# Altium PCB smartControllerDIP.PCBDOC
Units mm, origin at the board's own origin, x right, y up, seen from the top; angles counter-clockwise.
Board outline 152.4 x 101.6 mm, 2 copper layers (Top Layer, Bottom Layer); 23 components, 29 nets, 129 pads, 6 vias.
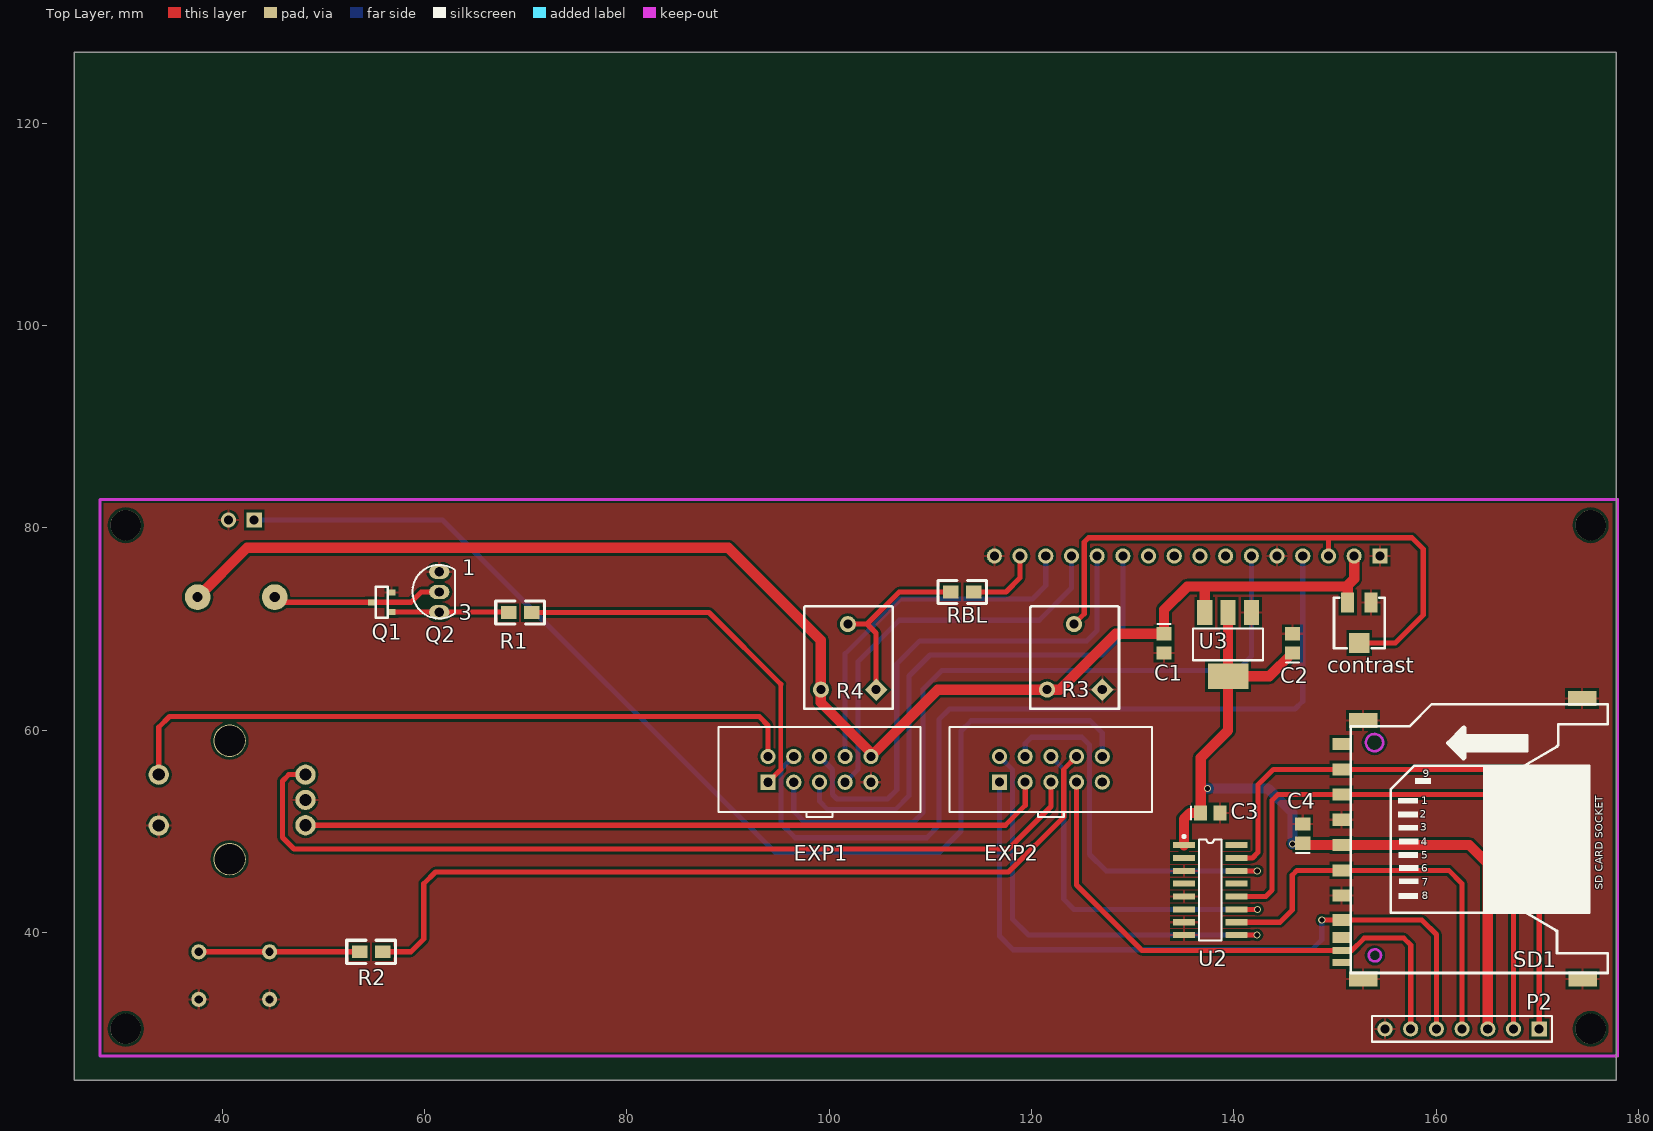
[diagram p0: Top Layer view]
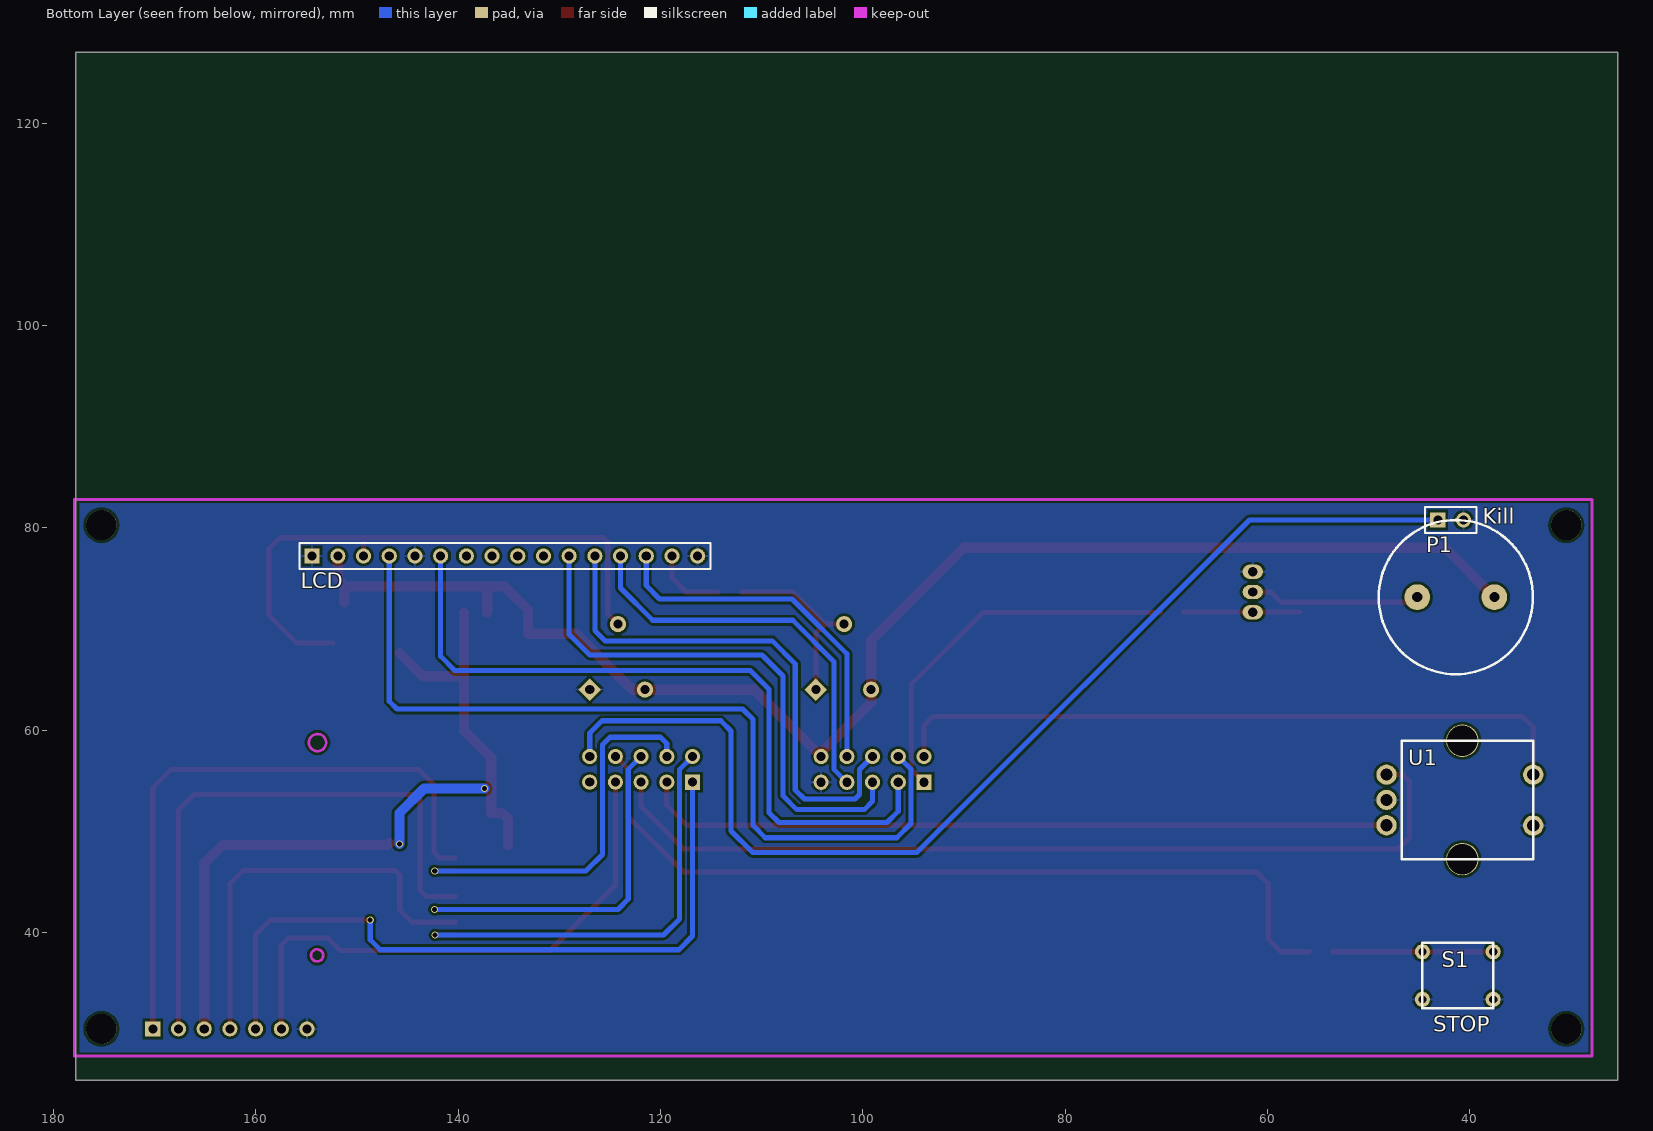
[diagram p1: Bottom Layer view, seen from below]

## Layer stack, top to bottom
Top Layer: signal copper 0.0356
Dielectric: dielectric 0.32, FR-4, Dk 4.8
Bottom Layer: signal copper 0.0356

## Board outline
25.4,25.4 177.8,25.4 177.8,127 25.4,127

## Design rules (kind name [scope] priority, off if disabled: settings)
Clearance [All] p1: gap=0.254
ComponentClearance [All] p1: gap=0.254 collisioncheckmode=0
HoleSize [All] p1: absolutevalues=TRUE maxlimit=3.81 minlimit=0.025 maxpercent=80.000 minpercent=20.000
PolygonConnect [All] p1: connectstyle=Relief reliefconductorwidth=0.254 reliefentries=4 polygonreliefangle="90 Angle"
RoutingVias [All] p1: holewidth=0.711 width=1.27 viastyle="Through Hole" minholewidth=0.5 minwidth=0.7 maxholewidth=0.711 maxwidth=1.27
SolderMaskExpansion [All] p1: expansion=0.102
TestPointUsage [All] p1: valid=0 allowmultiple=FALSE
Testpoint [All] p1: side=15 testpointundercomponent=TRUE minsize=1.016 maxsize=2.54 preferedsize=1.524 minholesize=0 maxholesize=1.016 preferedholesize=0.813 testpointgrid=0.025 style=1023 order=1234567890
Width power [InNetClass('power')] p1: maxlimit=1.016 minlimit=0.254 preferedwidth=1.016
Width [All] p2: maxlimit=1.016 minlimit=0.254 preferedwidth=0.508
16 further rules are at their usual default settings.

## Classes and differential pairs
net class power: GND VCC VDD

## Components (designator, comment, footprint, x,y, rotation, side; value= is the part's Value field where it differs from the comment)
C1 "Cap Pol3" CC2012-0805 133.096,68.58 r270 top
C2 "Cap Pol3" CC2012-0805 145.796,68.58 r90 top
C3 "Cap Pol3" CC2012-0805 137.668,51.816 r0 top
C4 "Cap Pol3" CC2012-0805 146.812,49.784 r90 top
contrast "RPot SM" POT4MM-2 152.4,70.612 r270 top
EXP1 "Header 5X2" 10pin牛角公座 93.968,54.858 r0 top
EXP2 "Header 5X2" 10pin牛角公座 116.84,54.864 r0 top
Kill "Bell" speaker 45.212,73.152 r180 bottom (schematic designator K1ll)
LCD "Header 16" HDR1X16 154.432,77.216 r180 bottom
P1 "Header 2" HDR1X2 43.18,80.772 r180 bottom
P2 "Header 7" HDR1X7 170.18,30.48 r180 top
Q1 "S8050" sot-23 56.388,71.12 r90 top
Q2 "S8050" A684 61.468,73.66 r270 top
R1 "Res1" 0805 70.612,71.628 r180 top
R2 "Res1" 0805 55.88,38.1 r180 top
R3 "VR1" VR1 127,64.008 r180 top
R4 "VR1" VR1 104.648,64.008 r180 top
RBL "Res1" 0805 114.3,73.66 r180 top
S1 "SW DIP4" "SW DIP4" 44.704,38.1 r270 bottom
SD1 "SD硈钡竟" SD-4 162.56,49.276 r90 top
U1 "上下數 編碼器" "上下數 編碼器" 48.25,55.607 r270 bottom
U2 "MC74HC4050D" 751B-03 137.668,44.196 r270 top
U3 "LM1117" SOT-223 141.732,71.628 r180 top

## Footprints (in the part's own frame and the unit in brackets; to place one, negate y for a bottom-side part, rotate by r counter-clockwise, add the part's x,y. Pads: shape width x height; smd on the part's side, far side on the other; paste and mask are expansions set on the pad)
10pin牛角公座 [mm]
  rect 1.5x1.5 hole 0.9: 1(0,0)
  round 1.5 hole 0.9: 2(0,2.54) 3(2.54,0) 4(2.54,2.54) 5(5.08,0) 6(5.08,2.54) 7(7.62,0) 8(7.62,2.54) 9(10.16,0) 10(10.16,2.54)
  silkscreen extent -4.92,-3.43 15.08,5.47
751B-03 [mm] "Small Outline; 16 Leads; Body Width 3.9 mm; Pitch 1.27 mm"
  rect 0.6x2.2 smd: 1(-4.445,-2.6) 2(-3.175,-2.6) 3(-1.905,-2.6) 4(-0.635,-2.6) 5(0.635,-2.6) 6(1.905,-2.6) 7(3.175,-2.6) 8(4.445,-2.6) 9(4.445,2.6) 10(3.175,2.6) 11(1.905,2.6) 12(0.635,2.6) 13(-0.635,2.6) 14(-1.905,2.6) 15(-3.175,2.6) 16(-4.445,2.6)
  silkscreen extent -5.42,-2.72 5,1.1
0805 [mil]
  rect 60x50 smd: 1(0,0) 2(90,0)
  silkscreen extent -50,-45 140,45
A684 [mm]
  oval 1.4x2 hole 0.9: 1(-2,0) 2(0,0) 3(2,0)
  silkscreen extent -2.68,-2.65 2.62,1.55
CC2012-0805 [mm] "Chip Capacitor; Body 2.0 x 1.2 mm (LxW typ)"
  rect 1.3x1.5 smd: 1(-0.95,0) 2(0.95,0)
  silkscreen extent -1.9,-0.65 -1.9,0.65
HDR1X2 [mm] "Connector; Header; 2 Position"
  rect 1.5x1.5 hole 0.9: 1(0,0)
  round 1.5 hole 0.9: 2(2.54,0)
  silkscreen extent -1.27,-1.27 3.81,1.27
HDR1X7 [mm] "Connector; Header; 7 Position"
  rect 1.5x1.5 hole 0.9: 1(0,0)
  round 1.5 hole 0.9: 2(2.54,0) 3(5.08,0) 4(7.62,0) 5(10.16,0) 6(12.7,0) 7(15.24,0)
  silkscreen extent -1.27,-1.27 16.51,1.27
HDR1X16 [mm] "Connector; Header; 16 Position"
  rect 1.5x1.5 hole 0.9: 1(0,0)
  round 1.5 hole 0.9: 2(2.54,0) 3(5.08,0) 4(7.62,0) 5(10.16,0) 6(12.7,0) 7(15.24,0) 8(17.78,0) 9(20.32,0) 10(22.86,0) 11(25.4,0) 12(27.94,0) 13(30.48,0) 14(33.02,0) 15(35.56,0) 16(38.1,0)
  silkscreen extent -1.27,-1.27 39.37,1.27
POT4MM-2 [mm] "Square Trimming Potentiometer"
  rect 2x1.3 smd: CCW(-2,-1.15) CW(-2,1.15)
  rect 2x2 smd: W(2,0)
  silkscreen extent -2.5,-2.5 2.5,2.5
SD-4 [mm]
  rect 1.2x1.8 smd: 1(6.858,11.917) 2(4.369,11.917) 3(1.875,11.908) 4(-0.625,11.908) 5(-3.125,11.908) 6(-5.625,11.908) 7(-8.05,11.908) 9(9.375,11.908)
  rect 1.1x1.8 smd: 8(-9.754,11.917)
  rect 0.7x1.8 smd: 10(-11.05,11.908) 12(-12.243,11.917)
  rect 1.5x2.8 smd: 11(-13.868,-11.917) 11(-13.868,9.774) 11(11.684,9.774) 11(13.868,-11.866)
  Keep-Out Layer circle w0.254: c-11.532,8.617 r0.6
  Keep-Out Layer circle w0.254: c9.5,8.657 r0.85
  silkscreen extent -13.27,-14.38 13.3,11.02
sot-23 [mm]
  rect 0.6x0.8 smd: 1(0.56,-0.36) 2(2.48,-0.36) 3(1.52,1.56)
  silkscreen extent 0,0 3.04,1.2
SOT-223 [mm]
  rect 1.5x2.5 smd: 1(0,0) 2(2.3,0) 3(4.6,0)
  rect 4x2.5 smd: 4(2.3,6.3)
  silkscreen extent -1.15,1.58 5.75,4.72
speaker [mm]
  round 2.54 hole 1: 1(0,0) 2(7.62,0)
  silkscreen extent -3.81,-7.62 11.43,7.62
"SW DIP4" [mm]
  round 1.5 hole 0.8: 1A(0,7) 1B(0,0) 2A(4.699,7) 2B(4.699,0)
  silkscreen extent -0.89,0 5.56,7
VR1 [mm]
  rect 1.6x1.6 hole 0.9 rot 45: 1(0,0)
  round 1.6 hole 0.9: 2(2.794,-6.477) 3(5.461,0)
  silkscreen extent -1.65,-8.25 7.11,1.91
"上下數 編碼器" [mm]
  round 2 hole 1.2: 1(0,0) 2(2.5,0) 3(5,0) 4(5.029,14.5) 5(0,14.5)
  round 3.2 hole 3: 6(-3.35,7.5) 7(8.35,7.5)
  silkscreen extent -3.35,1.5 8.35,14.5

## Part data
C1 C2 C3 C4: "Polarized Capacitor (Surface Mount)"
contrast: "Square Trimming Potentiometer"
EXP1 EXP2: "Header, 5-Pin, Dual row"
Kill: "Electrical Bell"
LCD: "Header, 16-Pin"
P1: "Header, 2-Pin"
P2: "Header, 7-Pin"
Q1: library part 2N3904, "NPN General Purpose Amplifier"
Q2: library part A684
R1 R2 RBL: "Resistor"
R3 R4: "Potentiometer"
S1: "Single-Pole, Single-Throw Switch"
U2: "Hex Non-Inverting Buffer/Logic-Level Down Converter"
U3: library part MIC5209-3.3YS

## Free pads (board coordinates)
  round 3 hole 3: 3(175.26,30.48) 4(175.26,80.264) 5(30.48,30.48) 5(30.48,80.264) 5(175.26,30.48) 5(175.26,80.264) 6(30.48,30.48)

## Via types
v1: diameter 0.7, hole 0.5, Top Layer to Bottom Layer, 6 vias

## Nets (pads, with @x,y where several pads share a name; then routed paths per layer and width w, separated by ;. In a path a pad name is that pad's centre, name@x,y a point inside that pad or via, vN(x,y) a via of type N, cw(c..) or ccw(c..) an arc to the next point about the centre after c; other vN are vias at no path point)
CLK: P2.4 SD1.5 U2.10 | length 41.3
  Top Layer w0.508: U2.10 144.551,41.021 145.771,42.24 145.771,45.669 146.252,46.151 161.24,46.151 162.56,44.831 P2.4
GND: C1.2 C2.2 C3.2 C4.2 contrast.CW EXP1.9 LCD.1 LCD.5 LCD.16 P1.2 P2.7 Q1.2 Q2.1 R3.1 S1.2A S1.2B SD1.3 SD1.6 SD1.11 U1.2 U1.4 U2.3 U2.5 U2.7 U2.8 U3.1
LCD4: EXP1.5 LCD.11 | length 54.1
  Bottom Layer w0.508: EXP1.5 99.048,52.971 99.873,52.146 106.528,52.146 107.899,53.518 107.899,65.354 109.982,67.437 127,67.437 129.032,69.469 LCD.11
LCD5: EXP1.6 LCD.12 | length 52.1
  Bottom Layer w0.508: EXP1.6 100.33,56.116 100.33,54.882 ; 100.33,54.834 100.33,53.645 100.787,53.188 105.766,53.188 106.68,54.102 106.68,66.548 108.966,68.834 125.476,68.834 126.492,69.85 LCD.12
LCD6: EXP1.7 LCD.13 | length 39.7
  Bottom Layer w0.508: EXP1.7 102.87,56.14 102.87,57.374 ; 102.87,57.422 102.87,66.802 106.934,70.866 120.777,70.866 123.952,74.041 LCD.13
LCD7: EXP1.8 LCD.14 | length 35.7
  Bottom Layer w0.508: EXP1.8 101.588,67.552 107.01,72.974 120.091,72.974 121.412,74.295 LCD.14
LCDE: EXP1.3 LCD.6 | length 72.4
  Bottom Layer w0.508: EXP1.3 96.508,51.981 97.612,50.876 108.306,50.876 109.296,51.867 109.296,64.084 111.125,65.913 140.335,65.913 141.732,67.31 LCD.6
LCDRS: EXP1.4 LCD.4 | length 85.3
  Bottom Layer w0.508: 95.25,54.834 95.25,50.775 96.647,49.378 109.652,49.378 110.846,50.571 110.846,61.062 111.887,62.103 146.05,62.103 146.812,62.865 LCD.4 ; 95.25,54.882 95.25,56.14 EXP1.4
"MEGA 188EEPER": EXP1.1 R1.1 | length 37.8
  Top Layer w0.483: 95.225,56.115 95.225,64.541
  Top Layer w0.508: R1.1 88.138,71.628 95.225,64.541 ; EXP1.1 95.225,56.115
NetEXP1_2: EXP1.2 U1.5 | length 68.8
  Top Layer w0.508: U1.5 33.75,60.293 34.798,61.341 93.091,61.341 93.968,60.464 EXP1.2
NetEXP2_1: EXP2.1 P2.5 SD1.7 | length 71.2
  Top Layer w0.508: v1(148.693,41.226) 158.596,41.226 160.02,39.802 P2.5
  Bottom Layer w0.508: EXP2.1 116.84,39.649 118.186,38.303 147.701,38.303 148.693,39.296 v1(148.693,41.226)
NetEXP2_2: EXP2.2 U2.9 | length 43.4
  Top Layer w0.508: U2.9 v1(142.291,39.751)
  Bottom Layer w0.508: EXP2.2 118.11,56.134 118.11,41.351 119.71,39.751 v1(142.291,39.751)
NetEXP2_3: EXP2.3 U1.3 | length 74.2
  Top Layer w0.508: U1.3 117.409,50.607 119.38,52.578 EXP2.3
NetEXP2_4: EXP2.4 U2.14 | length 38.4
  Top Layer w0.508: U2.14 v1(142.316,46.101)
  Bottom Layer w0.508: EXP2.4 119.38,58.699 119.99,59.309 124.993,59.309 125.73,58.572 125.73,47.727 127.356,46.101 v1(142.316,46.101)
NetEXP2_5: EXP2.5 U1.1 | length 88.7
  Top Layer w0.508: U1.1 46.59,55.607 45.974,54.991 45.974,49.403 47.117,48.26 117.729,48.26 121.92,52.451 EXP2.5
NetEXP2_6: EXP2.6 U2.11 | length 36.3
  Top Layer w0.508: U2.11 v1(142.342,42.291)
  Bottom Layer w0.508: EXP2.6 123.19,56.134 123.19,43.307 124.206,42.291 v1(142.342,42.291)
NetEXP2_7: EXP2.7 P2.6 SD1.10 | length 54.9
  Top Layer w0.508: EXP2.7 124.46,44.704 130.938,38.226 151.662,38.226 152.883,39.446 156.794,39.446 157.48,38.76 P2.6
NetEXP2_8: EXP2.8 R2.1 | length 82.5
  Top Layer w0.508: R2.1 58.674,38.1 59.944,39.37 59.944,44.831 61.087,45.974 117.729,45.974 123.19,51.435 123.19,56.134 EXP2.8
NetEXP2_10: EXP2.10 P1.1 | length 111.4
  Bottom Layer w0.508: P1.1 61.798,80.772 94.64,47.93 110.922,47.93 113.03,50.038 113.03,59.919 114.046,60.935 125.781,60.935 127,59.715 EXP2.10
NetK1ll_1: Kill.1 Q1.3 Q2.2 | length 16.9
  Top Layer w0.508: Kill.1 45.724,72.64 58.67,72.64 59.69,73.66 Q2.2
NetLCD_15: LCD.15 RBL.1 | length 7.3
  Top Layer w0.508: RBL.1 117.475,73.66 118.872,75.057 LCD.15
NetP2_1: P2.1 SD1.1 U2.15 | length 62
  Top Layer w0.508: U2.15 141.834,47.371 142.392,47.93 142.392,54.61 143.916,56.134 168.351,56.134 170.18,54.305 P2.1
NetP2_2: P2.2 SD1.2 U2.12 | length 59
  Top Layer w0.508: U2.12 143.154,43.561 143.789,44.196 143.789,53.086 144.348,53.645 166.116,53.645 167.64,52.121 P2.2
NetQ1_1: Q1.1 Q2.3 R1.2 | length 11.6
  Top Layer w0.508: Q1.1 68.274,71.68 R1.2
NetR2_2: R2.2 S1.1A S1.1B | length 15.9
  Top Layer w0.508: S1.1A R2.2
NetR4_1: R4.1 R4.2 RBL.2 | length 18.3
  Top Layer w0.508: R4.2 103.759,70.485 ; R4.1 104.648,69.596 103.759,70.485 ; RBL.2 106.934,73.66 103.759,70.485
VCC: C1.1 contrast.CCW EXP1.10 Kill.2 LCD.2 R3.3 R4.3 U3.3 | length 143.8
  Top Layer w1.016: Kill.2 42.469,78.029 90.043,78.029 99.187,68.885 99.187,62.738 104.128,57.797 EXP1.10 110.738,64.008 122.809,64.008 128.331,69.53 C1.1 133.096,71.907 135.385,74.196 151.107,74.196 ; U3.3 137.132,74.196 ; contrast.CCW 151.25,74.053 151.107,74.196 ; LCD.2 151.892,74.981 151.107,74.196
VDD: C2.1 C3.1 C4.1 P2.3 SD1.4 U2.1 U3.2 U3.4 | length 80.6
  Top Layer w1.016: U2.1 135.068,51.223 135.661,51.816 C3.1 136.718,57.292 139.432,60.006 U3.2 ; U3.4 143.494,65.328 C2.1 ; C4.1 146.995,48.651 163.287,48.651 165.1,46.838 P2.3
  Bottom Layer w1.016: v1(137.414,54.229) 143.383,54.229 145.796,51.816 v1(145.796,48.768)
VLCD: contrast.W LCD.3 R3.2 | length 58.5
  Top Layer w0.508: R3.2 125.222,71.501 125.222,78.613 125.628,79.019 157.607,79.019 158.718,77.908 158.718,71.374 155.956,68.612 contrast.W ; LCD.3 149.352,79.019
pads on no net: EXP2.9 LCD.7 LCD.8 LCD.9 LCD.10 SD1.8 SD1.9 SD1.12 U1.6 U1.7 U2.2 U2.4 U2.6 U2.13 U2.16

## Polygon pours and split planes (outlines as drawn)
GND on Top Layer (solid, remove dead copper): 28.321,82.423 28.321,28.194 177.419,28.194 177.419,82.423
GND on Bottom Layer (solid, remove dead copper): 28.321,82.423 28.321,28.194 177.419,28.194 177.419,82.423

## Keep-outs
Keep-Out Layer:
  lines w0.254: 27.94,27.804 177.94,27.804 177.94,82.804 27.94,82.804 27.94,27.804

## Silkscreen, mask and mechanical layers (free items; w line width, h text height)
Top Overlay:
  rectangle: 156.264,43.325 158.2,43.899
  rectangle: 156.282,47.393 158.218,47.967
  rectangle: 156.318,48.719 158.254,49.293
  rectangle: 156.318,46.103 158.254,46.676
  rectangle: 156.318,44.777 158.254,45.35
  rectangle: 156.282,50.081 158.218,50.655
  rectangle: 156.246,51.372 158.182,51.945
  rectangle: 156.246,52.734 158.182,53.307
  rectangle: 157.895,54.705 159.472,55.279
  rectangle: 162.734,57.913 169.007,58.325
  rectangle: 162.734,58.63 169.007,59.508
  rectangle: 161.775,58.2 162.358,58.773
  rectangle: 161.775,58.773 162.465,59.248
  rectangle: 161.497,58.469 162.322,59.078
  rectangle: 162.322,57.573 162.734,58.469
  rectangle: 162.017,57.895 162.734,59.705
  rectangle: 162.734,58.218 169.007,59.168
  rectangle: 164.634,41.945 175.1,56.497
  lines w0.254: 158.433,56.497 157.859,56.497 ; 162.734,59.454 162.788,59.508 169.007,59.508 169.007,57.913 162.967,57.913 162.913,57.967 ; 157.609,41.945 155.53,41.945 155.53,54.168 157.859,56.497 ; 157.609,41.945 157.609,41.945 ; 157.609,41.945 175.1,41.945 175.1,56.497 159.974,56.497 157.859,56.497 ; 162.734,58.218 162.734,59.168 169.007,59.168 169.007,58.218 162.734,58.218
  lines w0.5: 162.734,57.304 162.734,60.207
  lines w0.508: 162.698,57.268 161.247,58.72 162.734,60.207
  text "9" at 158.648,55.35 h0.76
  text "1" at 158.54,52.698 h0.76
  text "2" at 158.397,51.372 h0.76
  text "3" at 158.433,50.046 h0.76
  text "4" at 158.469,48.612 h0.76
  text "5" at 158.54,47.286 h0.76
  text "6" at 158.54,46.031 h0.76
  text "7" at 158.576,44.633 h0.76
  text "SD CARD SOCKET" at 176.462,44.239 h0.76 r90
  text "8" at 158.576,43.271 h0.76
Bottom Overlay:
  text "STOP" at 43.637,30.201 h1.54
Mechanical 1:
  text "Data2" at 159.616,54.634 h0.76
  text "CS" at 159.472,52.698 h0.76
  text "Data IN" at 159.472,51.336 h0.76
  text "VSS1" at 159.401,49.974 h0.76
  text "VDD" at 159.401,48.755 h0.76
  text "CLK" at 159.544,47.393 h0.76
  text "VSS2" at 159.472,45.959 h0.76
  text "Data OUT" at 159.544,44.669 h0.76
  text "Data1" at 159.616,43.235 h0.76

## Text inside footprints (layer, text, board x,y; h text height)
Q2: Top Overlay "3" at 63.373,70.866 h1.5; Top Overlay "1" at 63.754,75.311 h1.5